# EAGLE board AlphaNumeric-Display-Driver (EAGLE 5.06)
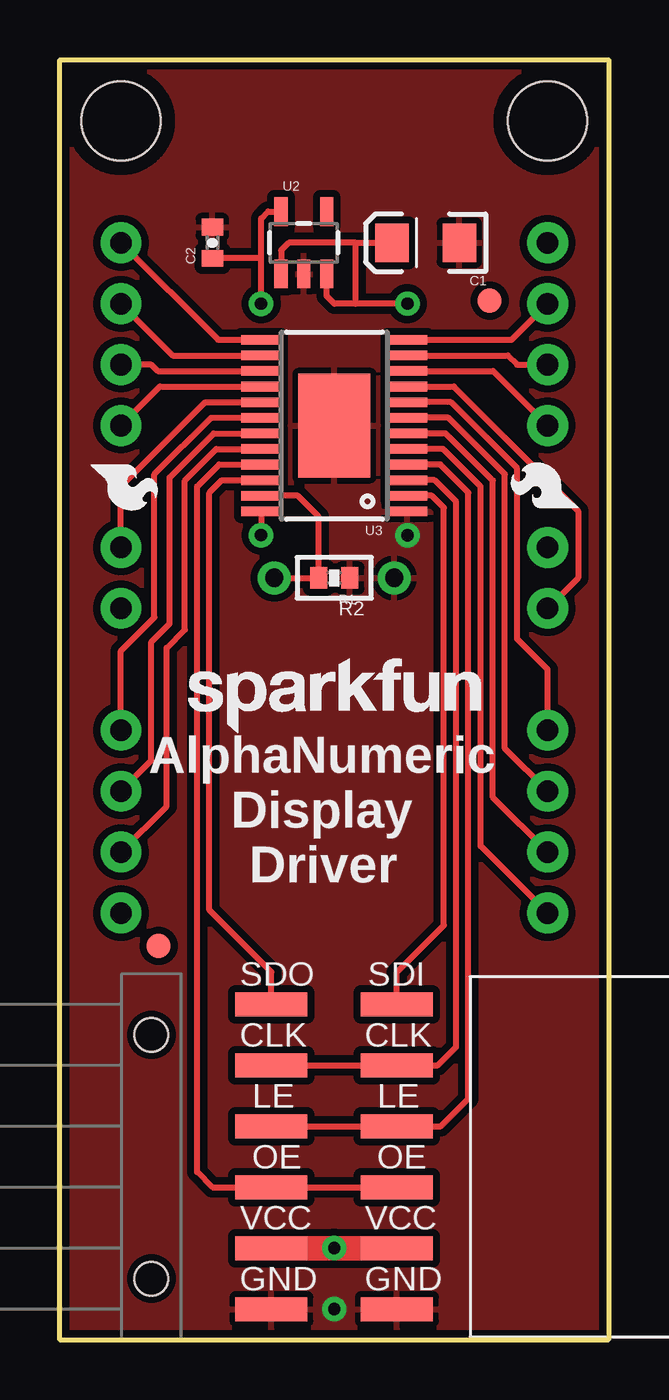
[diagram p0: board, top side]
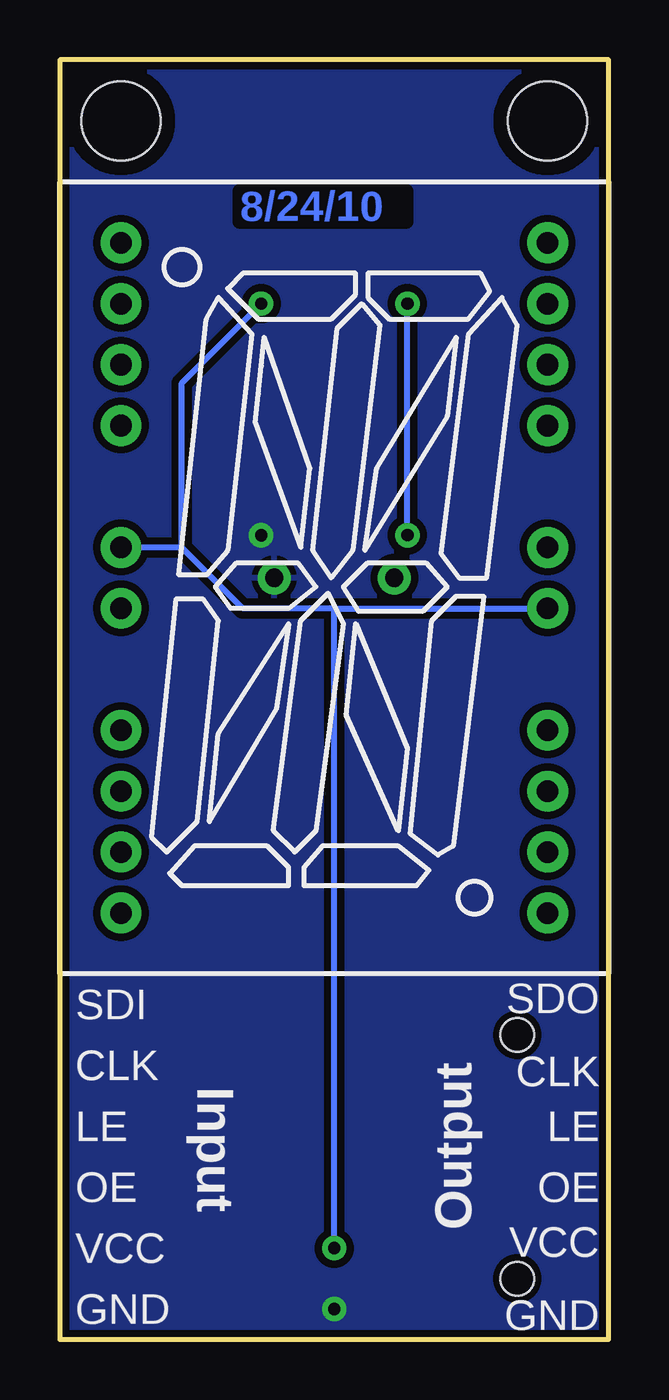
[diagram p1: board, bottom side, seen from below]

Size 22.86 x 53.34 mm. Coordinates in mm from the lower left corner, seen from the top.
Outline: 0,0 22.86,0 22.86,53.34 0,53.34 0,0
Copper layers (1*16): Top 0.035mm / dielectric 1.5mm / Bottom 0.035mm
Design rules "SparkFun": minimum track width 8mil, minimum drill 20mil, track to track 8mil, track to pad 8mil, pad to pad 8mil, via to via 8mil, smd to smd 8mil, copper to edge 8mil, drill to drill 8mil, minimum pad ring 12mil, minimum via ring 10mil, stop-mask expansion 4mil, vias tented up to drill 20mil, thermal gap 10mil

## Footprints (pad centres in the part's own frame; a part is rotated, then mirrored left to right if it is on the bottom)
EIA3216 = smd 1.4 x 1.6: A 1.4,0; C -1.4,0
0402-CAP = smd 0.7 x 0.9: 1 -0.65,0; 2 0.65,0
1X06-SMD-FEMALE-V2 = smd 1 x 3: 1 6.35,4.5; 2 3.81,4.5; 3 1.27,4.5; 4 -1.27,4.5; 5 -3.81,4.5; 6 -6.35,4.5
STAND-OFF = hole 3.302: 0,0
FIDUCIAL-1X2 = smd 1 x 1: 1 0,0
1X06-SMD = smd 1 x 3: 1 -6.35,5; 2 -3.81,5; 3 -1.27,5; 4 1.27,5; 5 3.81,5; 6 6.35,5 | hole 1.4: -5.08,0; 5.08,0
0402-RES = smd 0.7 x 0.9: 1 -0.65,0; 2 0.65,0
1/6W-RES = drill 0.762 round: 1 -2.5,0; 2 2.5,0
ALPHANUMERIC = drill 0.9 pad 1.7 round: 1 -8.89,13.97; 2 -8.89,11.43; 3 -8.89,8.89; 4 -8.89,6.35; 6 -8.89,1.27; 7 -8.89,-1.27; 9 -8.89,-6.35; 10 -8.89,-8.89; 11 -8.89,-11.43; 12 -8.89,-13.97; 13 8.89,-13.97; 14 8.89,-11.43; 15 8.89,-8.89; 16 8.89,-6.35; 18 8.89,-1.27; 19 8.89,1.27; 21 8.89,6.35; 22 8.89,8.89; 23 8.89,11.43; 24 8.89,13.97
SOT23-5 = smd 0.55 x 1.2: 1 -0.95,-1.3; 2 0,-1.3; 3 0.95,-1.3; 4 0.95,1.3; 5 -0.95,1.3
TSSOP-24 = smd 0.4 x 1.65: 1 -3.575,-3.05; 2 -2.925,-3.05; 3 -2.275,-3.05; 4 -1.625,-3.05; 5 -0.975,-3.05; 6 -0.325,-3.05; 7 0.325,-3.05; 8 0.975,-3.05; 9 1.625,-3.05; 10 2.275,-3.05; 11 2.925,-3.05; 12 3.575,-3.05; 13 3.575,3.05; 14 2.925,3.05; 15 2.275,3.05; 16 1.625,3.05; 17 0.975,3.05; 18 0.325,3.05; 19 -0.325,3.05; 20 -0.975,3.05; 21 -1.625,3.05; 22 -2.275,3.05; 23 -2.925,3.05; 24 -3.575,3.05 | smd 4.32 x 3: EP 0,0

## Placement (x,y rotation side)
C1  10uF  [EIA3216]  15.24,45.72 180 top
C2  0.1uF  [0402-CAP]  6.35,45.72 90 top
INPUT  [1X06-SMD-FEMALE-V2]  18.54,7.62 90 top
JP1  LOGO-SFESK  [SFE-LOGO-FLAME]  1.27,36.45 270 top
JP2  STAND-OFF  [STAND-OFF]  2.54,50.8 0 top
JP3  STAND-OFF  [STAND-OFF]  20.32,50.8 0 top
JP4  LOGO-SFENW2  [SFE-NEW-WEB]  5.33,25.27 0 top
JP5  LOGO-SFESK  [SFE-LOGO-FLAME]  21.59,34.67 90 top
JP6  FIDUCIAL1X2  [FIDUCIAL-1X2]  4.11,16.41 0 top
JP7  FIDUCIAL1X2  [FIDUCIAL-1X2]  17.91,43.31 0 top
OUTPUT  [1X06-SMD]  3.81,7.62 270 top
R1  4.7k  [0402-RES]  11.43,31.75 180 top
R2  DNP  [1/6W-RES]  11.43,31.75 180 top
U1  DNP  [ALPHANUMERIC]  11.43,31.75 0 bottom
U2  V_REG_LDOSMD  [SOT23-5]  10.16,45.72 0 top
U3  A6282-LP  [TSSOP-24]  11.43,38.1 90 top
U$1  CREATIVE_COMMONS  [CREATIVE_COMMONS]  0,-2.54 0 top

## Library data of the parts
C1 C2 INPUT JP1-JP7 OUTPUT R1 R2 U1-U3 U$1 = SparkFun

## Nets
3.3V: C2.1 U2.5 U3.24
A1: U1.2 U3.12
A2: U1.22 U3.15
B: U1.21 U3.16
C: U1.16 U3.18
CLK: INPUT.2 OUTPUT.2 U3.3
D1: U1.10 U3.7
D2: U1.14 U3.20
E: U1.9 U3.8
F: U1.4 U3.10
G1: U1.7 U3.9
G2: U1.19 U3.17
GND: C1.C C2.2 INPUT.6 OUTPUT.6 R1.1 R2.1 U2.2 U3.1 U3.EP
H: U1.3 U3.11
J: U1.24 U3.13
K: U1.23 U3.14
L: U1.15 U3.19
LE: INPUT.3 OUTPUT.3 U3.4
M: U1.12 U3.5
N: U1.11 U3.6
OE: INPUT.4 OUTPUT.4 U3.21
REXT: R1.2 R2.2 U3.23
SDI: INPUT.1 U3.2
SDO: OUTPUT.1 U3.22
VCC: C1.A INPUT.5 OUTPUT.5 U1.6 U1.18 U2.1 U2.3

## Tracks (layer width: path | path; a pad name or v marks a point on that pad's centre or on a via)
3.3V  (via drill 0.51)
  Top 0.254: U3.24 v8.38,33.53 | v8.38,43.18 8.38,45.09 | C2.1 8.37,45.07 8.38,45.09 | 8.38,45.09 8.38,46.73 8.67,47.02 U2.5
  Bottom 0.254: v8.38,33.53 v8.38,43.18
A1
  Top 0.254: U1.2 18.82,41.67 U3.12
A2
  Top 0.254: U1.22 3.81,40.64 4.08,40.38 U3.15
B
  Top 0.254: U1.21 4.17,39.73 U3.16
C
  Top 0.254: U1.16 2.54,28.7 3.94,30.1 3.94,36.07 6.29,38.42 U3.18
CLK
  Top 0.254: OUTPUT.2 INPUT.2 15.75,11.43 16.51,12.19 16.51,34.92 15.61,35.83 U3.3
D1
  Top 0.254: U3.7 16.18,38.42 18.54,36.07 18.54,24.64 U1.10
D2
  Top 0.254: U3.20 6.52,37.12 5.21,35.81 5.21,29.59 4.45,28.83 4.45,22.23 U1.14
E
  Top 0.254: U1.9 20.32,27.94 19.05,29.21 19.05,36.32 16.3,39.08 U3.8
F
  Top 0.254: U1.4 18.05,40.38 U3.10
G1
  Top 0.254: U3.9 16.41,39.73 21.59,34.54 21.59,31.75 U1.7
G2
  Top 0.254: U1.19 2.54,35.56 6.05,39.08 U3.17
GND  (via drill 0.51)
  other vias: 14.48,33.53 11.43,1.27
  pour Bottom (isolate 0.305): 0,53.34 0,0 22.86,0 22.86,53.34
  pour Top (isolate 0.305): 0,53.34 0,0 22.86,0 22.86,53.34
H
  Top 0.254: U1.3 19.05,40.64 18.66,41.02 U3.11
J
  Top 0.254: U1.24 6.58,41.67 U3.13
K
  Top 0.254: U1.23 4.7,41.02 U3.14
L
  Top 0.254: U1.15 3.81,24.13 3.81,29.08 4.57,29.84 4.57,35.94 6.41,37.77 U3.19
LE
  Top 0.254: U3.4 15.85,36.48 17.02,35.31 17.02,10.03 15.88,8.89 INPUT.3 OUTPUT.3
M
  Top 0.254: U1.12 17.53,20.57 17.53,35.56 15.96,37.12 U3.5
N
  Top 0.254: U3.6 16.07,37.77 18.03,35.81 18.03,22.61 U1.11
OE
  Top 0.254: U3.21 6.63,36.48 5.71,35.56 5.71,6.99 6.35,6.35 OUTPUT.4 INPUT.4
REXT
  Top 0.254: U3.23 9.91,35.17 10.78,34.3 R1.2 R2.2
SDI
  Top 0.254: U3.2 15.5,35.17 16,34.67 16,17.27 14.04,15.31 INPUT.1
SDO
  Top 0.254: U3.22 6.74,35.83 6.22,35.31 6.22,17.91 8.81,15.32 OUTPUT.1
VCC  (via drill 0.51)
  Top 0.254: U2.1 9.21,45.41 9.53,45.72 12.32,45.72 | U2.3 11.11,43.5 11.43,43.18 12.32,43.18 | 12.32,45.72 C1.A | 12.32,43.18 12.32,45.72 | v14.48,43.18 12.32,43.18
  Top 1.016: OUTPUT.5 v11.43,3.81 INPUT.5
  Bottom 0.254: 17.78,33.02 U1.6 | 17.78,33.02 15.24,30.48 11.43,30.48 | 11.43,30.48 U1.18 | v11.43,3.81 11.43,30.48 | 17.78,33.02 17.78,39.88 v14.48,43.18

## Text on the board
Bottom: 8/24/10
tPlace: AlphaNumeric | Display | Driver | SDO | SDI | CLK | CLK | LE | LE | OE | OE | VCC | VCC | GND | GND
bPlace: SDO | SDI | CLK | Output | Input | CLK | LE | LE | OE | OE | VCC | VCC | GND | GND